# Altium PCB SPI Isolator Panel.PcbDoc
Units mm, origin at the board's own origin, x right, y up, seen from the top; angles counter-clockwise.
Board outline 163 x 141 mm, 2 copper layers (Top Layer, Bottom Layer), stack 1.621 mm thick; 4 components, 0 nets, 4 pads, 0 vias.
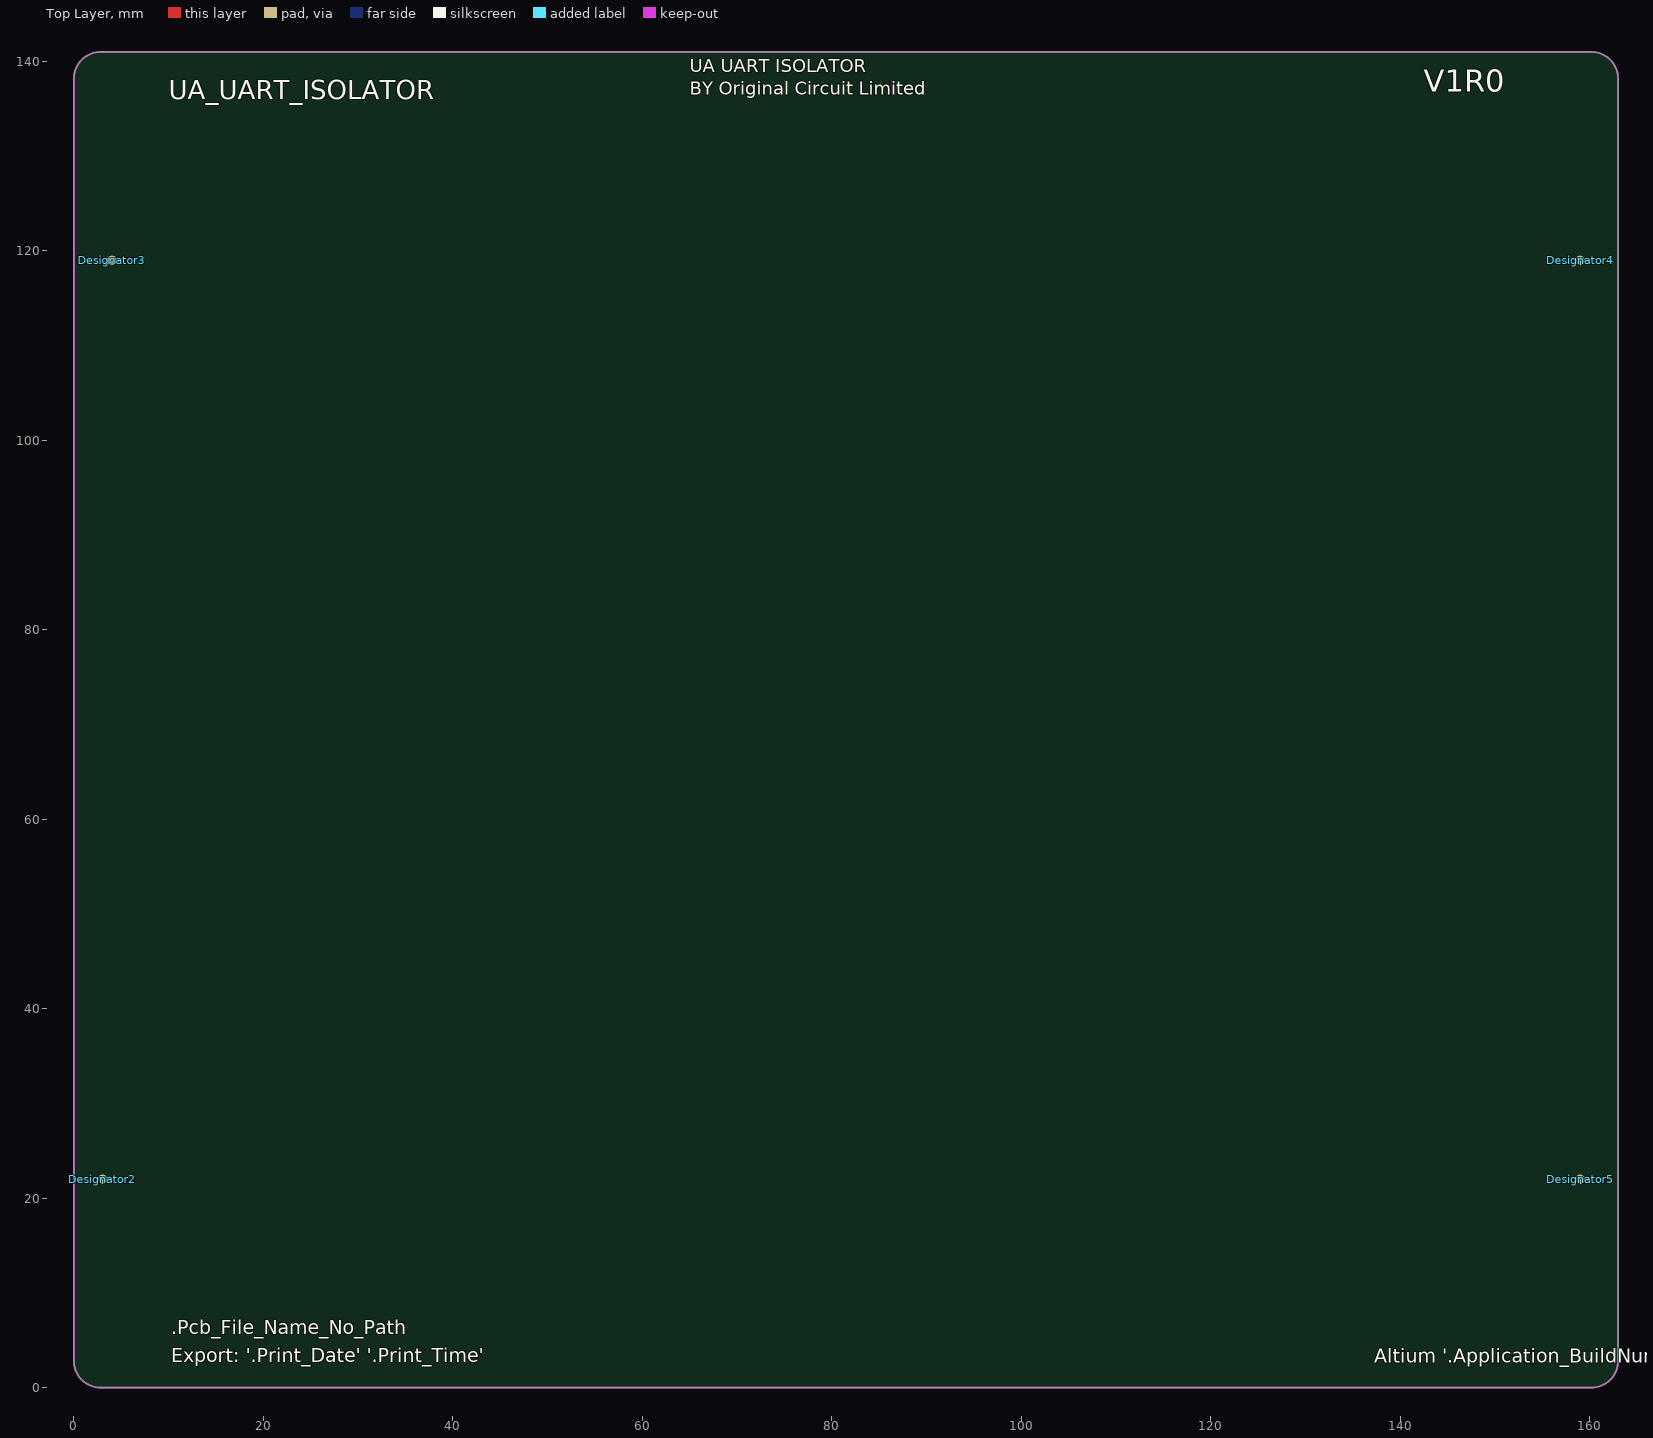
[diagram p0: Top Layer view]
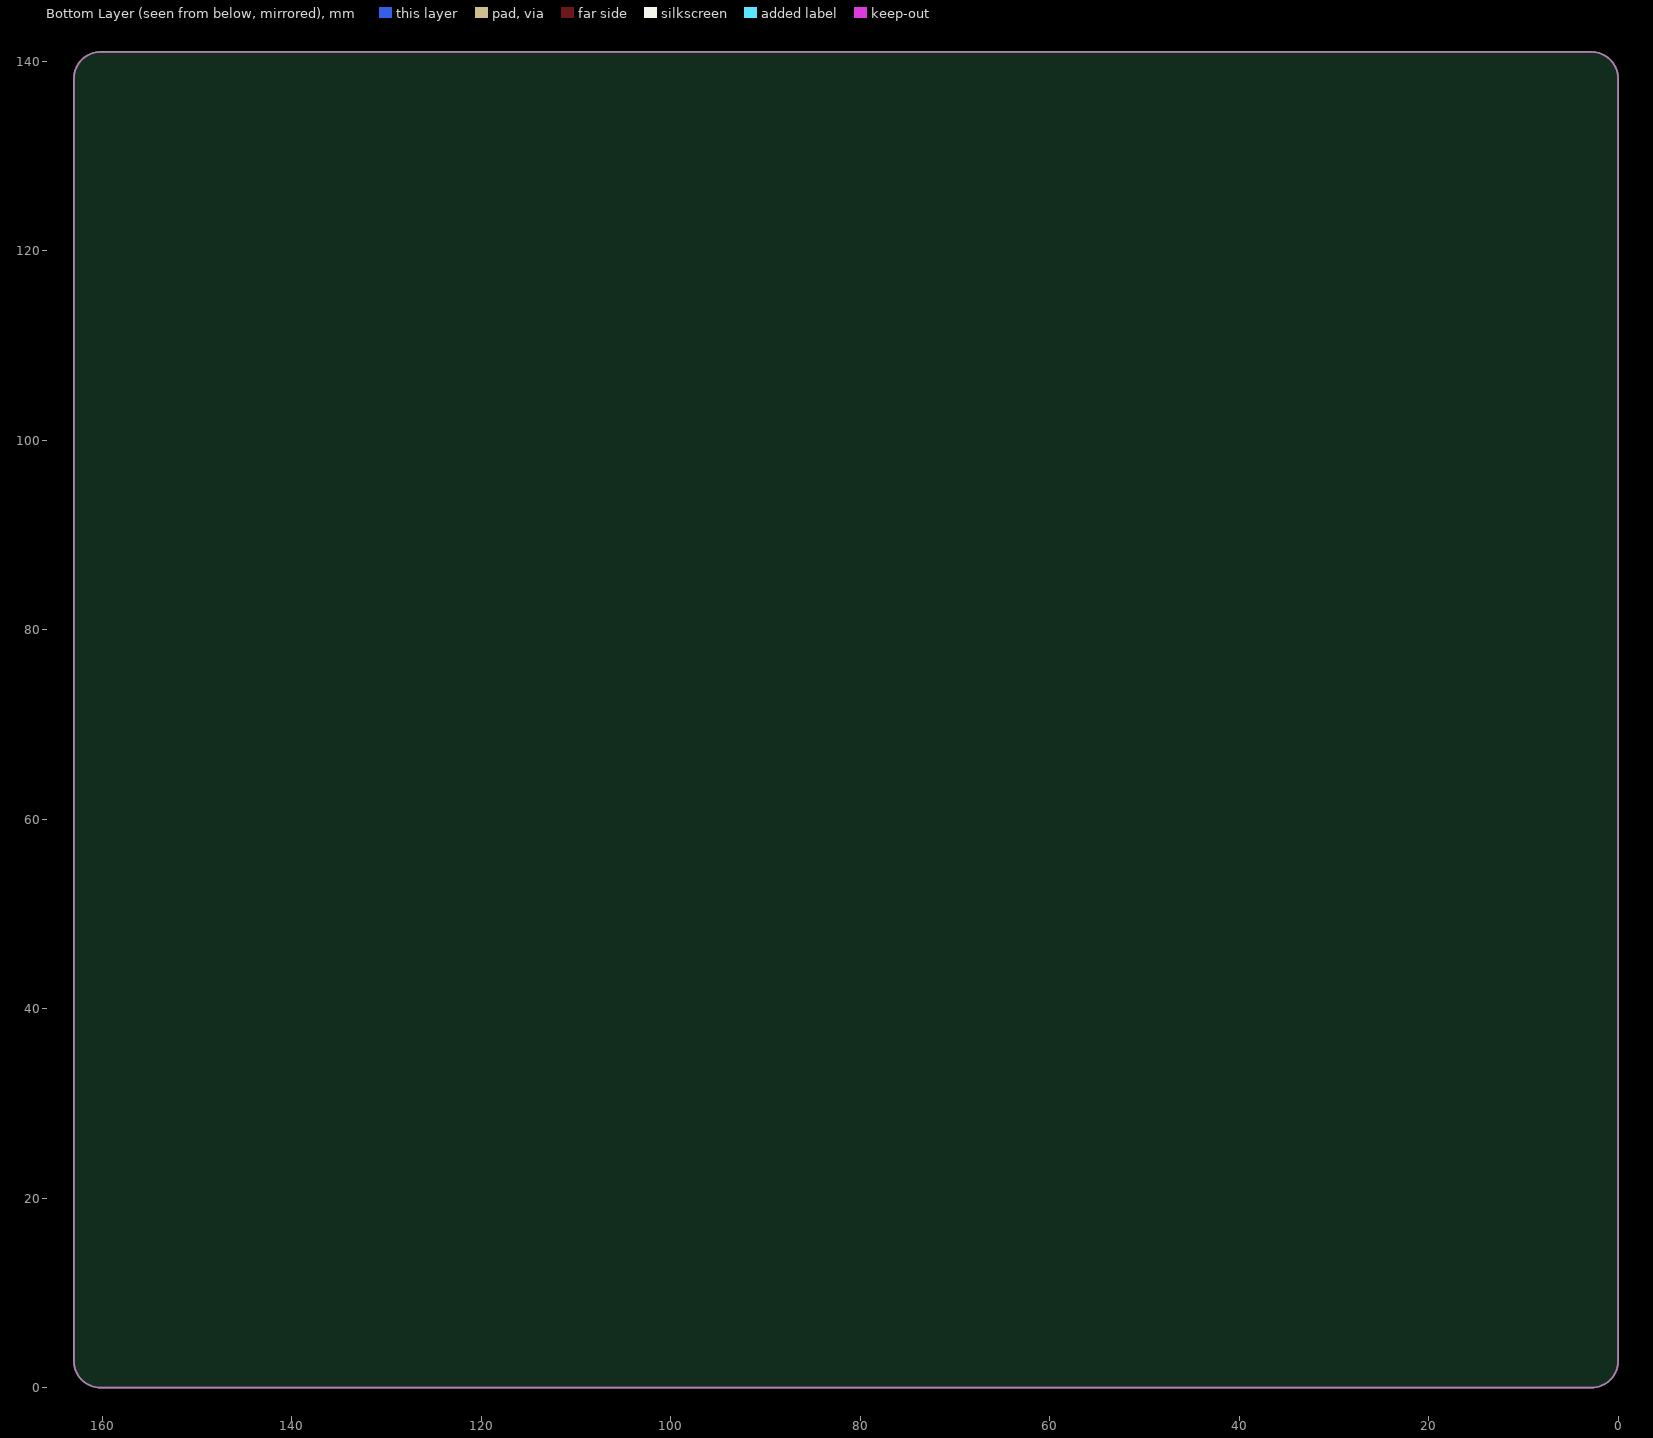
[diagram p1: Bottom Layer view, seen from below]

## Layer stack, top to bottom
Top Solder: solder mask 0.0102, Solder Resist, Dk 3.5
Top Layer: signal copper 0.0356
Dielectric 1: dielectric 1.55, FR-4, Dk 4.8
Bottom Layer: signal copper 0.0356
Bottom Solder: solder mask 0.0102, Solder Resist, Dk 3.5

## Board outline
0,2.794 0,138.206 cw(c2.794,138.206) 2.794,141 160.206,141 cw(c160.206,138.206) 163,138.206 163,2.794 cw(c160.206,2.794) 160.206,0 2.794,0 cw(c2.794,2.794)

## Design rules (kind name [scope] priority, off if disabled: settings)
Clearance [All] p1: gap=0.254 ignorepadtopadclearanceinfootprint=FALSE
PolygonConnect [All] p1: connectstyle=Relief reliefconductorwidth=0.254 reliefentries=4 polygonreliefangle="90 Angle" airgapwidth=0.254
RoutingVias [All] p1: holewidth=0.711 width=1.27 viastyle="Through Hole" minholewidth=0.711 minwidth=1.27 maxholewidth=0.711 maxwidth=1.27
SolderMaskExpansion [All] p1: expansion=0.102 istentingtop=FALSE
Width [All] p1: maxlimit=0.254 minlimit=0.254 preferedwidth=0.254
30 further rules are at their usual default settings.

## Components (designator, comment, footprint, x,y, rotation, side; value= is the part's Value field where it differs from the comment)
Designator2 "Comment" Fiducial-1mm 3,22 r0 top
Designator3 "Comment" Fiducial-1mm 4,119 r0 top
Designator4 "Comment" Fiducial-1mm 159,119 r0 top
Designator5 "Comment" Fiducial-1mm 159,22 r0 top

## Footprints (in the part's own frame and the unit in brackets; to place one, negate y for a bottom-side part, rotate by r counter-clockwise, add the part's x,y. Pads: shape width x height; smd on the part's side, far side on the other; paste and mask are expansions set on the pad)
Fiducial-1mm [mm]
  round 1 smd paste-1 mask+0.5: F(0,0)
  Top Layer pour cut-out: -1,0 -0.924,0.383 -0.707,0.707 -0.383,0.924 0,1 0,1 0.383,0.924 0.707,0.707 0.924,0.383 1,0 1,0 0.924,-0.383 0.707,-0.707 0.383,-0.924 0,-1 0,-1 -0.383,-0.924 -0.707,-0.707 -0.924,-0.383 -1,0

## Nets (pads, with @x,y where several pads share a name; then routed paths per layer and width w, separated by ;. In a path a pad name is that pad's centre, name@x,y a point inside that pad or via, vN(x,y) a via of type N, cw(c..) or ccw(c..) an arc to the next point about the centre after c; other vN are vias at no path point)
pads on no net: Designator2.F Designator3.F Designator4.F Designator5.F

## Keep-outs
Keep-Out Layer:
  lines w0.2: 0,2.794 ccw(c2.794,2.794) 2.794,0 160.206,0 ccw(c160.206,2.794) 163,2.794 163,138.206 ccw(c160.206,138.206) 160.206,141 5,141 2.794,141 ccw(c2.794,138.206) 0,138.206 0,2.794

## Silkscreen, mask and mechanical layers (free items; w line width, h text height)
Top Overlay:
  text "UA_UART_ISOLATOR" at 10,136 h2
  text "UA UART ISOLATOR / BY Original Circuit Limited" at 65,136 h2.4
  text "V1R0" at 142.5,136 h4
  text ".Pcb_File_Name_No_Path" at 10.25,5.143 h2.5
  text "Export: '.Print_Date' '.Print_Time'" at 10.25,2.183 h2.5
  text "Altium '.Application_BuildNumber'" at 137.25,2.143 h2.5
Route Tool Path (Mech8):
  text "ROUTING TOOLPATH LAYER" at 14.192,155.327 h2.5
V Cut (Mech9):
  lines w0.2: 7,-2 7,146 ; 52,-2 52,146 ; 59,-2 59,146 ; 104,-2 104,146 ; 111,-2 111,146 ; 156,-2 156,146
  text "V-SCORE LAYER" at 19.158,152.327 h2.5

## Panel: embedded boards
"SPI Isolator.PcbDoc" at 7,12, 3 rows x 3 columns, spacing 39.5 x 52, rotation 0